# EAGLE board Power_Board (EAGLE 6.4)
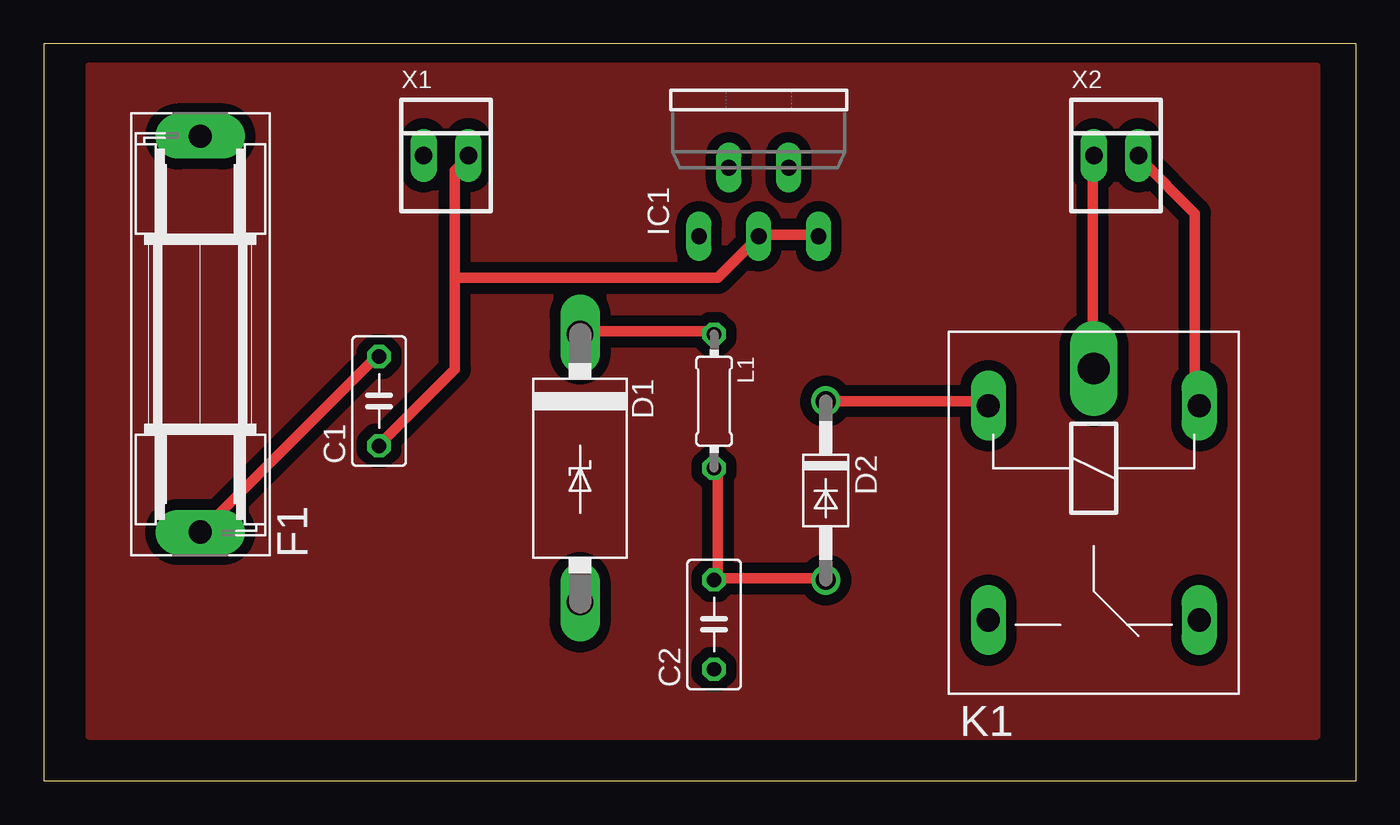
[diagram p0: board, top side]
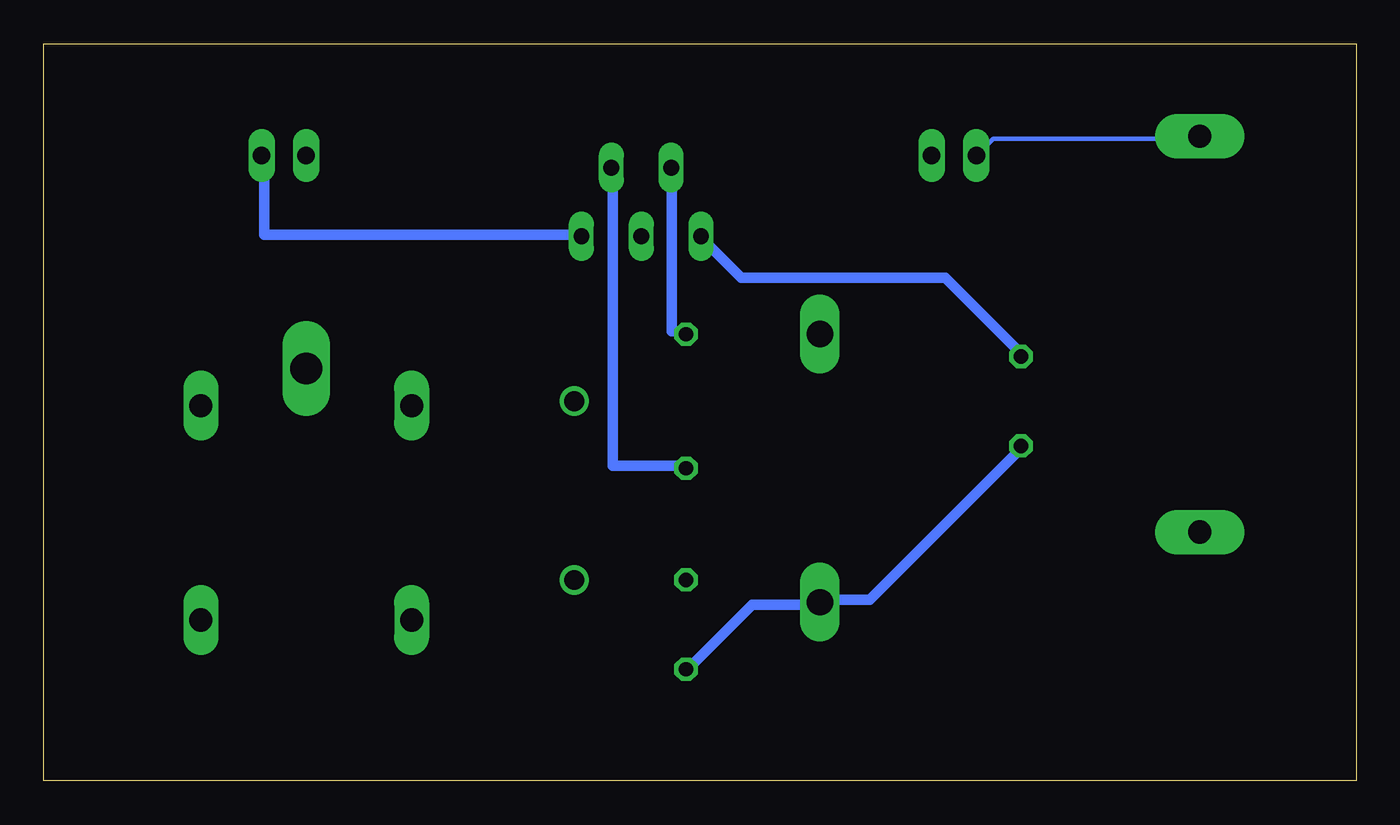
[diagram p1: board, bottom side, seen from below]

Size 74.6 x 41.9 mm. Coordinates in mm from the lower left corner, seen from the top.
Outline: 0,0 74.6,0 74.6,41.9 0,41.9 0,0
Copper layers (1*16): Top 0.035mm / dielectric 1.5mm / Bottom 0.035mm
Design rules "default *": minimum track width 10mil, minimum drill 24mil, track to track 24mil, track to pad 24mil, pad to pad 24mil, via to via 24mil, smd to smd 8mil, copper to edge 40mil, drill to drill 8mil, minimum pad ring 10mil, minimum via ring 8mil, stop-mask expansion 4mil, vias tented up to drill 0mil, thermal gap 10mil
Net classes: 1 GND: width 0.61 mm, drill 0.61 mm, clearance 0.61 mm; 2 POWER: width 0.61 mm, drill 0.61 mm, clearance 0.61 mm

## Footprints (pad centres in the part's own frame; a part is rotated, then mirrored left to right if it is on the bottom)
C050-030X075 = drill 0.813 octagon: 1 -2.54,0; 2 2.54,0
C4111-15 = drill 1.499 long: A 7.62,0; C -7.62,0
DO41-10 = drill 1.118: A 5.08,0; C -5.08,0
SH22,5 = drill 1.321 pad 2.54 long: 1 -11.252,0; 2 11.252,0
TO220-5 = drill 0.9 long: 1 -3.4,-8.4; 2 -1.7,-4.5; 3 0,-8.4; 4 1.7,-4.5; 5 3.4,-8.4
ZF112 = drill 1.321 long: 1 -6.096,5.994; 2 -6.096,-5.994; O 6.096,5.994; S 6.096,-5.994 | drill 1.803 long: P -8.204,0
0204/7 = drill 0.813 octagon: 1 -3.81,0; 2 3.81,0
22-23-2021 = drill 1 long: 1 -1.27,0; 2 1.27,0

## Placement (x,y rotation side)
C1  100 microF  [C050-030X075]  19.05,21.59 90 top
C2  1000microF  [C050-030X075]  38.1,8.89 90 top
D1  1N5908  [C4111-15]  30.48,17.78 270 top
D2  1N4004  [DO41-10]  44.45,16.51 270 top
F1  FUSESH22,5  [SH22,5]  8.89,25.4 90 top
IC1  LM2576T  [TO220-5]  40.64,39.37 0 top
K1  ZF112  [ZF112]  59.69,15.24 270 top
L1  100 microH  [0204/7]  38.1,21.59 270 top
X1  22-23-2021  [22-23-2021]  22.86,35.56 0 top
X2  22-23-2021  [22-23-2021]  60.96,35.56 0 top

## Library data of the parts
C1 C2 L1 = rcl
D1 D2 = diode
F1 = fuse; OC_FARNELL: unknown; OC_NEWARK: unknown
IC1 = v-reg-3
K1 = relay; OC_FARNELL: unknown; OC_NEWARK: unknown
X1 X2 = con-molex; MF: MOLEX; MPN: 22-23-2021; OC_FARNELL: 1462926; OC_NEWARK: 25C3832

## Nets
GND [GND]: C1.1 C2.1 D1.A IC1.3 IC1.5 K1.1 X1.2 X2.2
N$1 [POWER]: K1.P X2.1
N$2 [POWER]: D2.C K1.2
N$3 [POWER]: D1.C IC1.2 L1.1
N$4 [POWER]: C2.2 D2.A IC1.4 L1.2
N$5: F1.2 X1.1
VIN [POWER]: C1.2 F1.1 IC1.1

## Tracks (layer width: path | path; a pad name or v marks a point on that pad's centre or on a via)
GND
  Top 0.61: X2.2 62.38,35.31 65.43,32.26 65.43,21.59 K1.1 | IC1.5 43.79,31.04 40.74,31.04 IC1.3 40.44,30.73 38.3,28.6 23.37,28.6 | 23.37,28.6 23.37,23.42 19.1,19.15 C1.1 | 23.37,28.6 23.37,34.7 23.98,35.31 X1.2
  Bottom 0.61: C2.1 38,6.35 34.34,10.01 30.68,10.01 D1.A 30.38,10.31 27.64,10.31 19.1,18.85 C1.1 | X2.2 62.08,35.31 62.08,31.04 44.09,31.04 IC1.5
N$1
  Top 0.61: X2.1 59.64,35.31 59.64,23.72 K1.P
N$2
  Top 0.61: D2.C 53.54,21.59 K1.2
N$3
  Top 0.61: L1.1 38,25.55 30.68,25.55 D1.C
  Bottom 0.61: IC1.2 38.91,34.7 38.91,25.55 38.3,25.55 L1.1
N$4
  Top 0.61: L1.2 38.3,17.63 38.3,11.53 C2.2 38.61,11.53 44.4,11.53 D2.A
  Bottom 0.61: IC1.4 42.27,34.7 42.27,17.93 38.3,17.93 L1.2
N$5
  Bottom 0.254: X1.1 20.62,36.52 9.04,36.52 F1.2
N$6
  pour Top: 3.81,2.54 72.39,2.54 72.39,40.64 2.54,40.64 2.54,2.54
VIN
  Top 0.61: C1.2 18.8,24.03 9.04,14.28 F1.1
  Bottom 0.61: IC1.1 37.08,30.73 34.95,28.6 23.37,28.6 19.1,24.33 C1.2